# Altium PCB FOC_Mode_V1.PcbDoc
Units mm, origin at the board's own origin, x right, y up, seen from the top; angles counter-clockwise.
Board outline 28 x 45 mm, 6 copper layers (Top Layer, GND, Sig1, Sig2, Power, Bottom Layer), stack 1.878 mm thick; 102 components, 74 nets, 288 pads, 337 vias.
Unrouted connection lines stored in the file: 67.
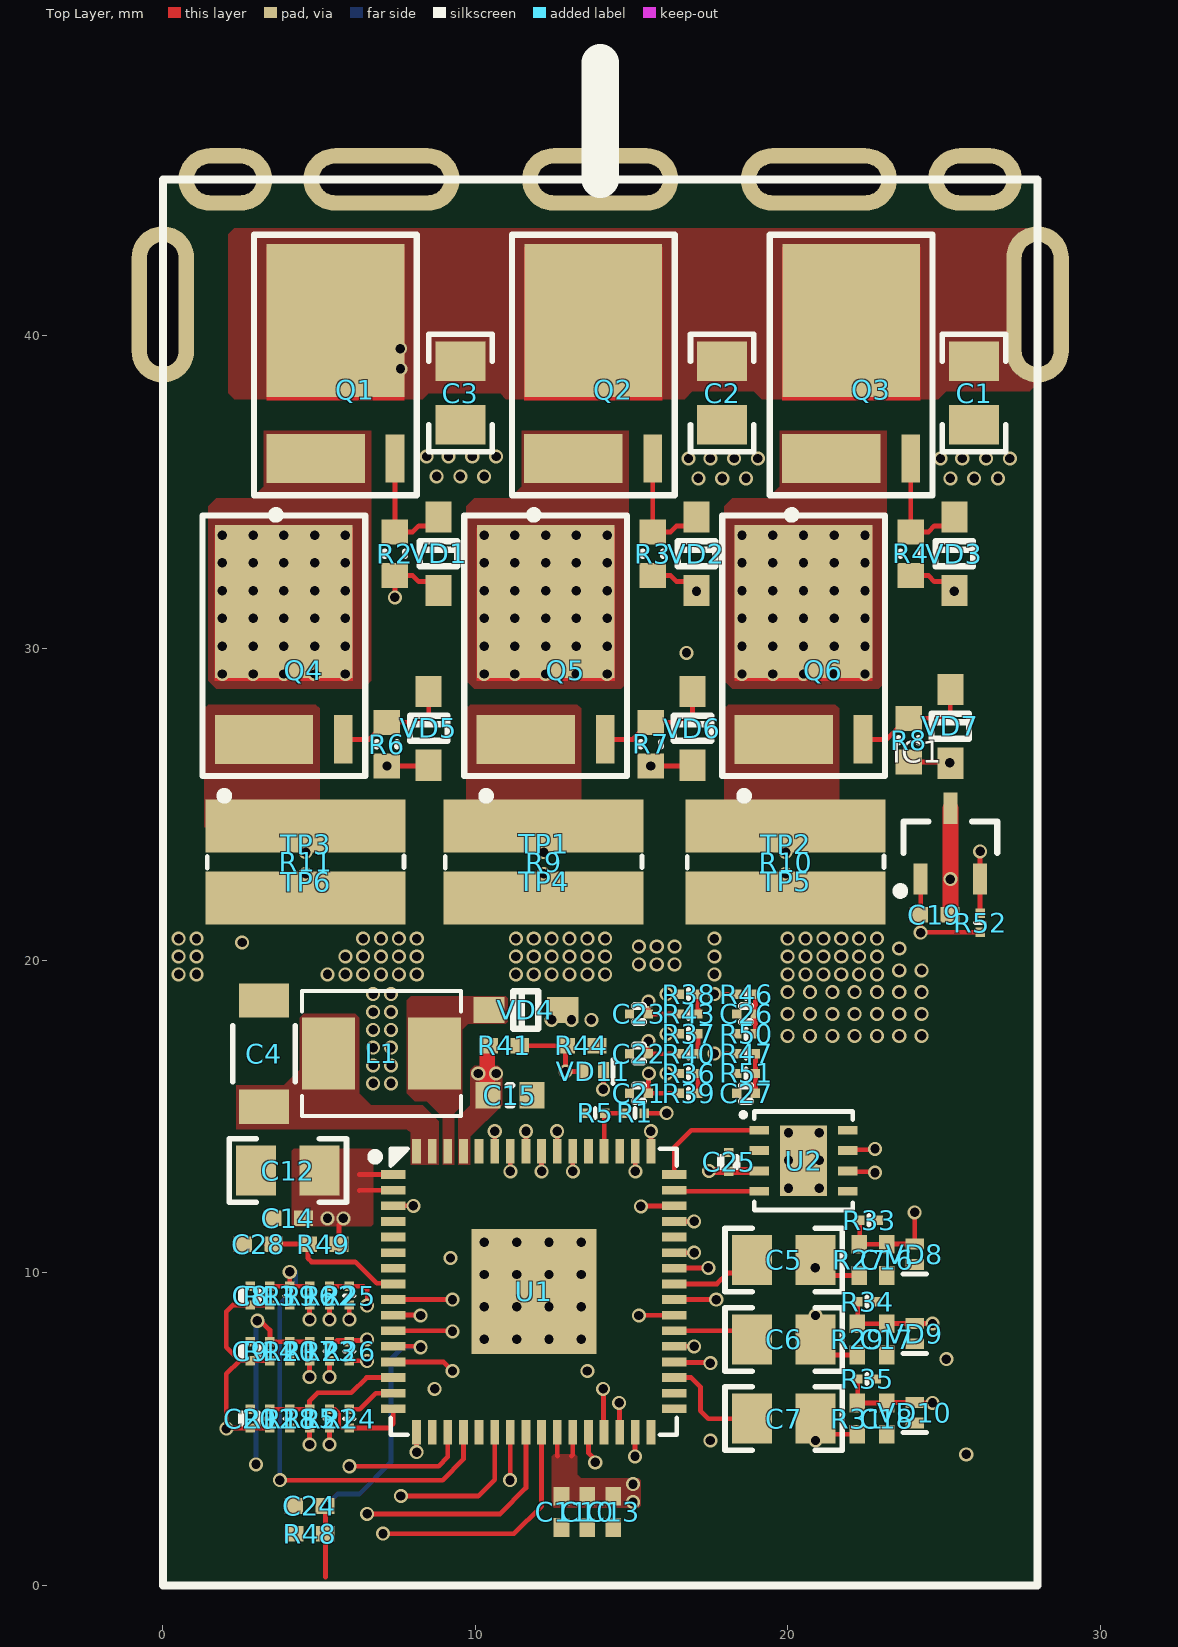
[diagram p0: Top Layer view]
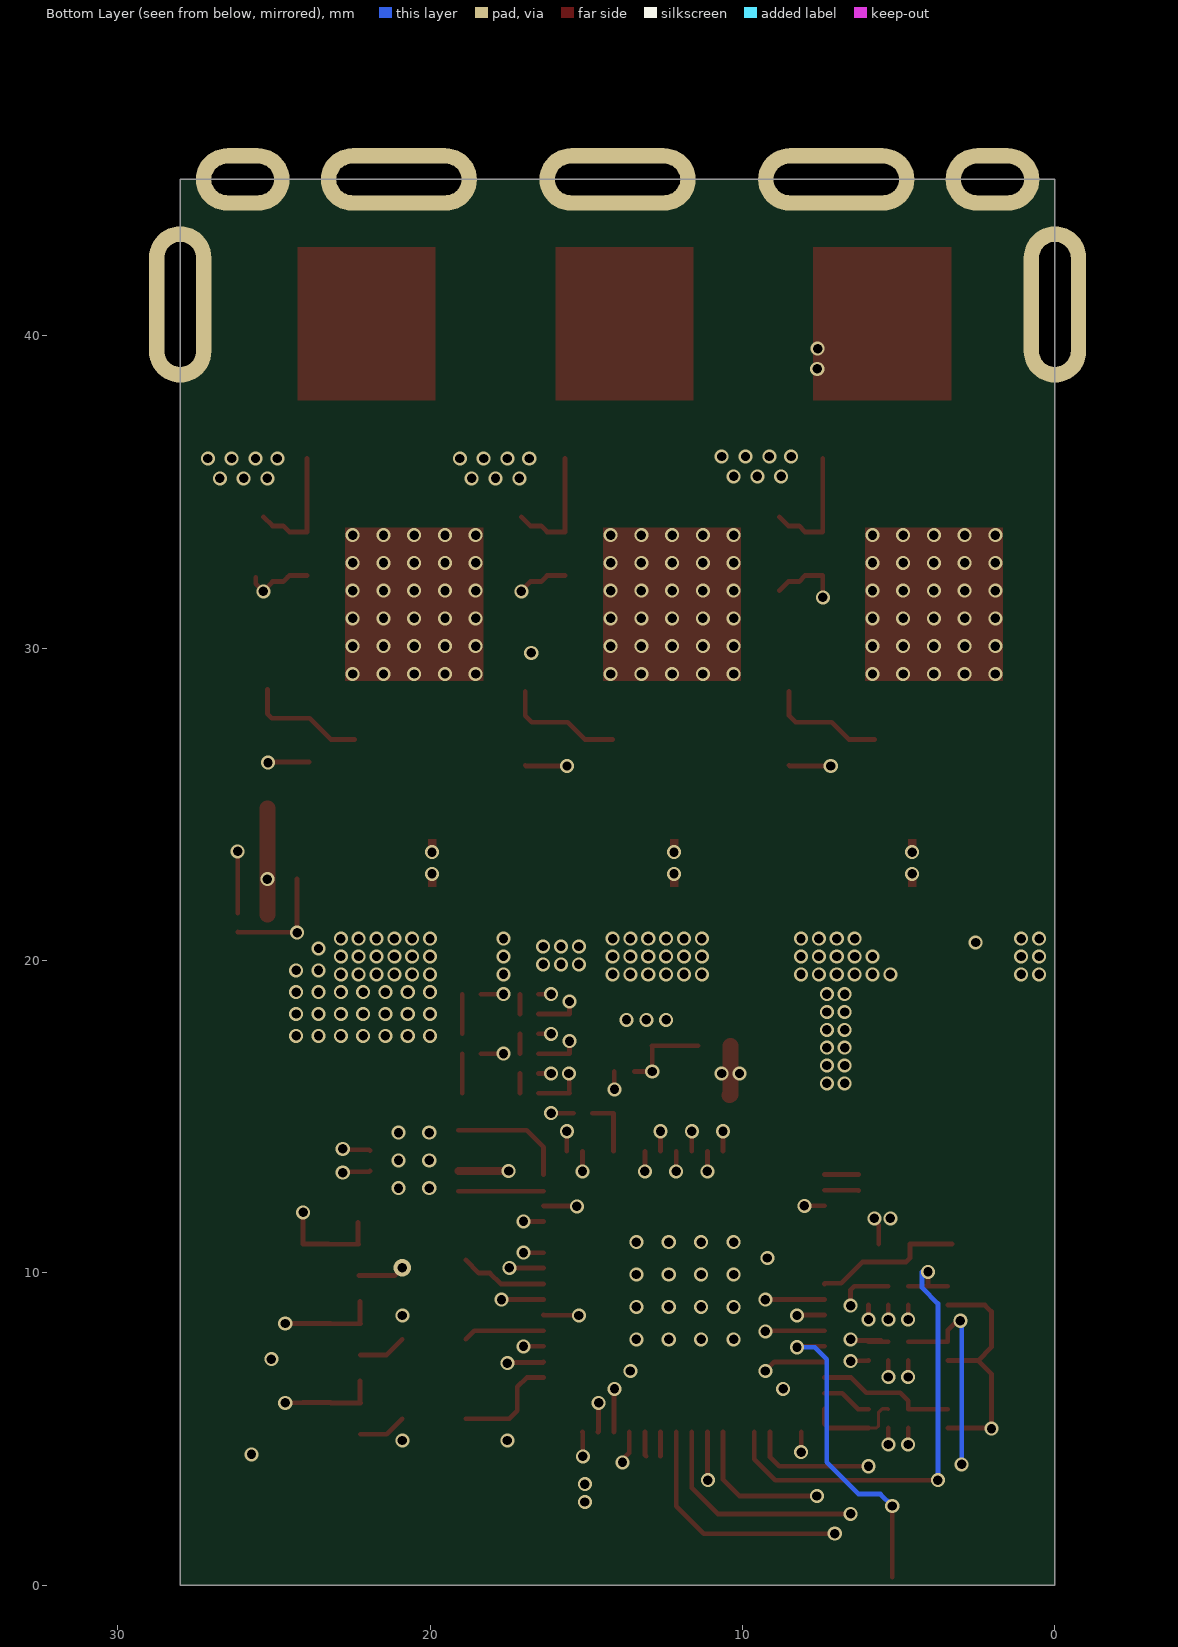
[diagram p1: Bottom Layer view, seen from below]
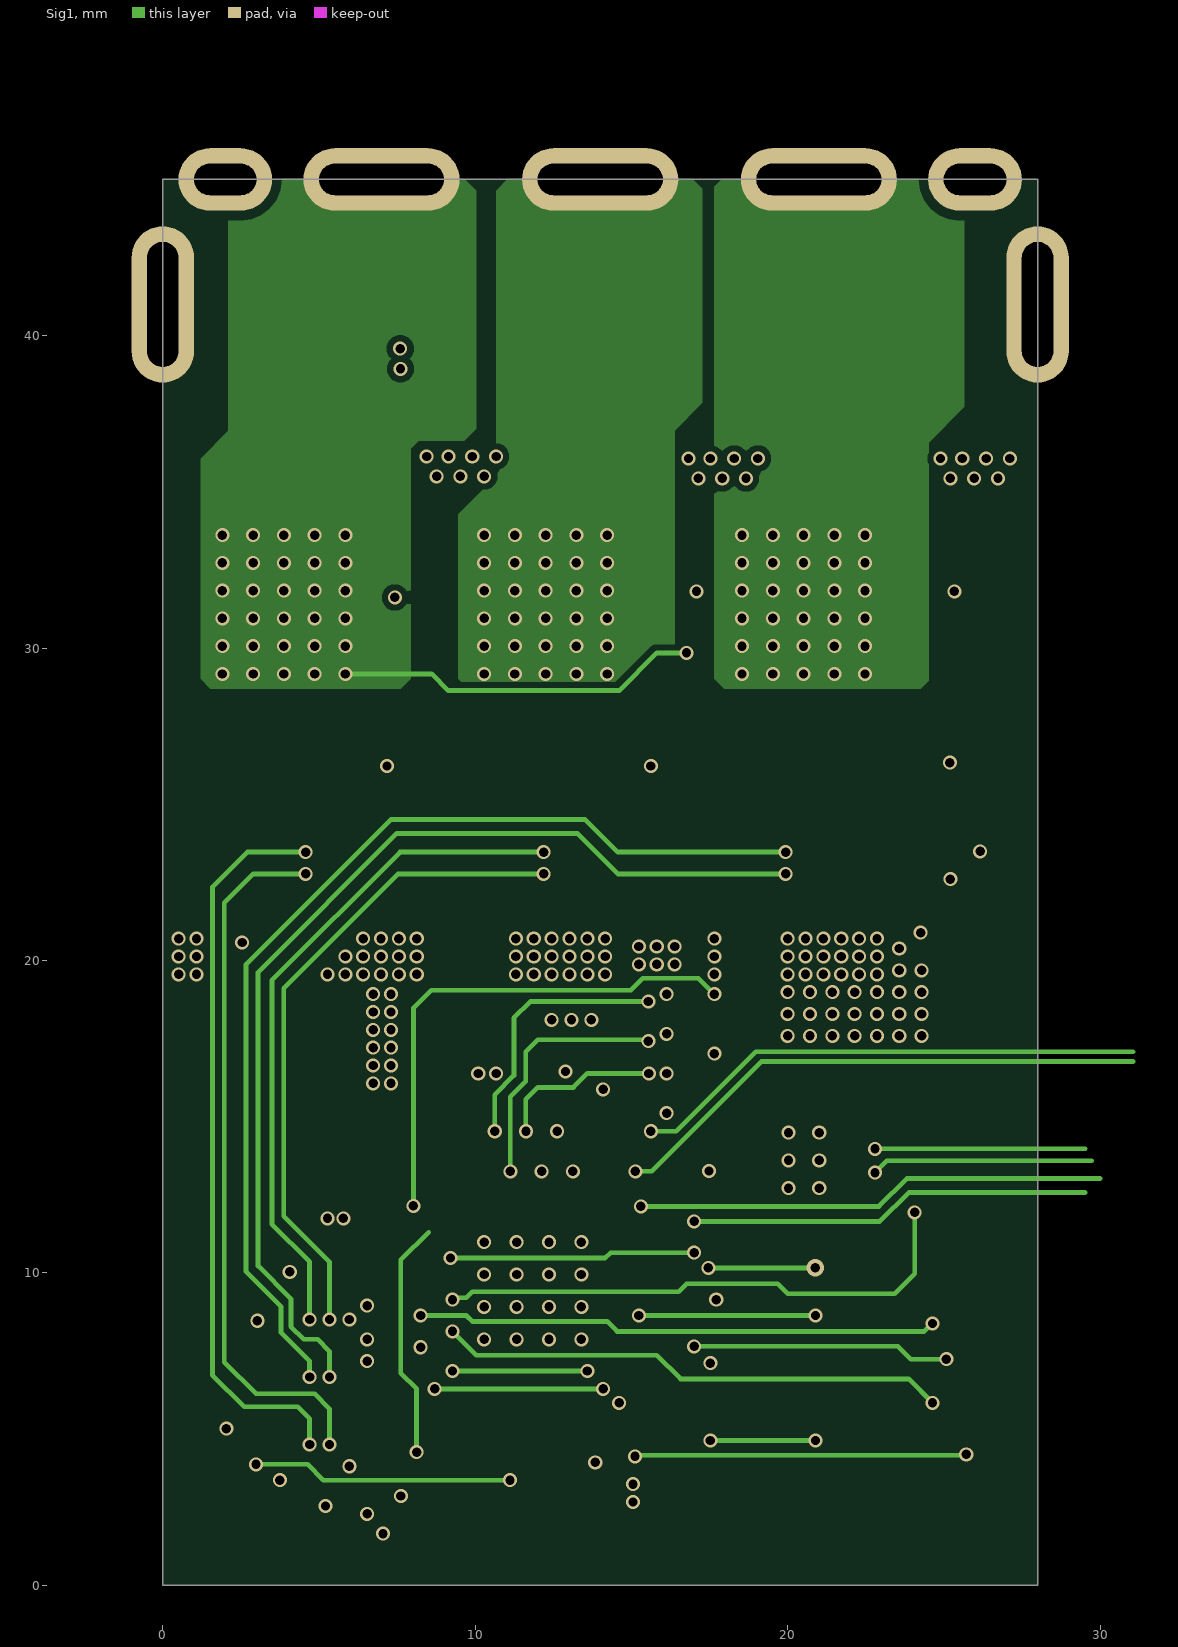
[diagram p2: Sig1]
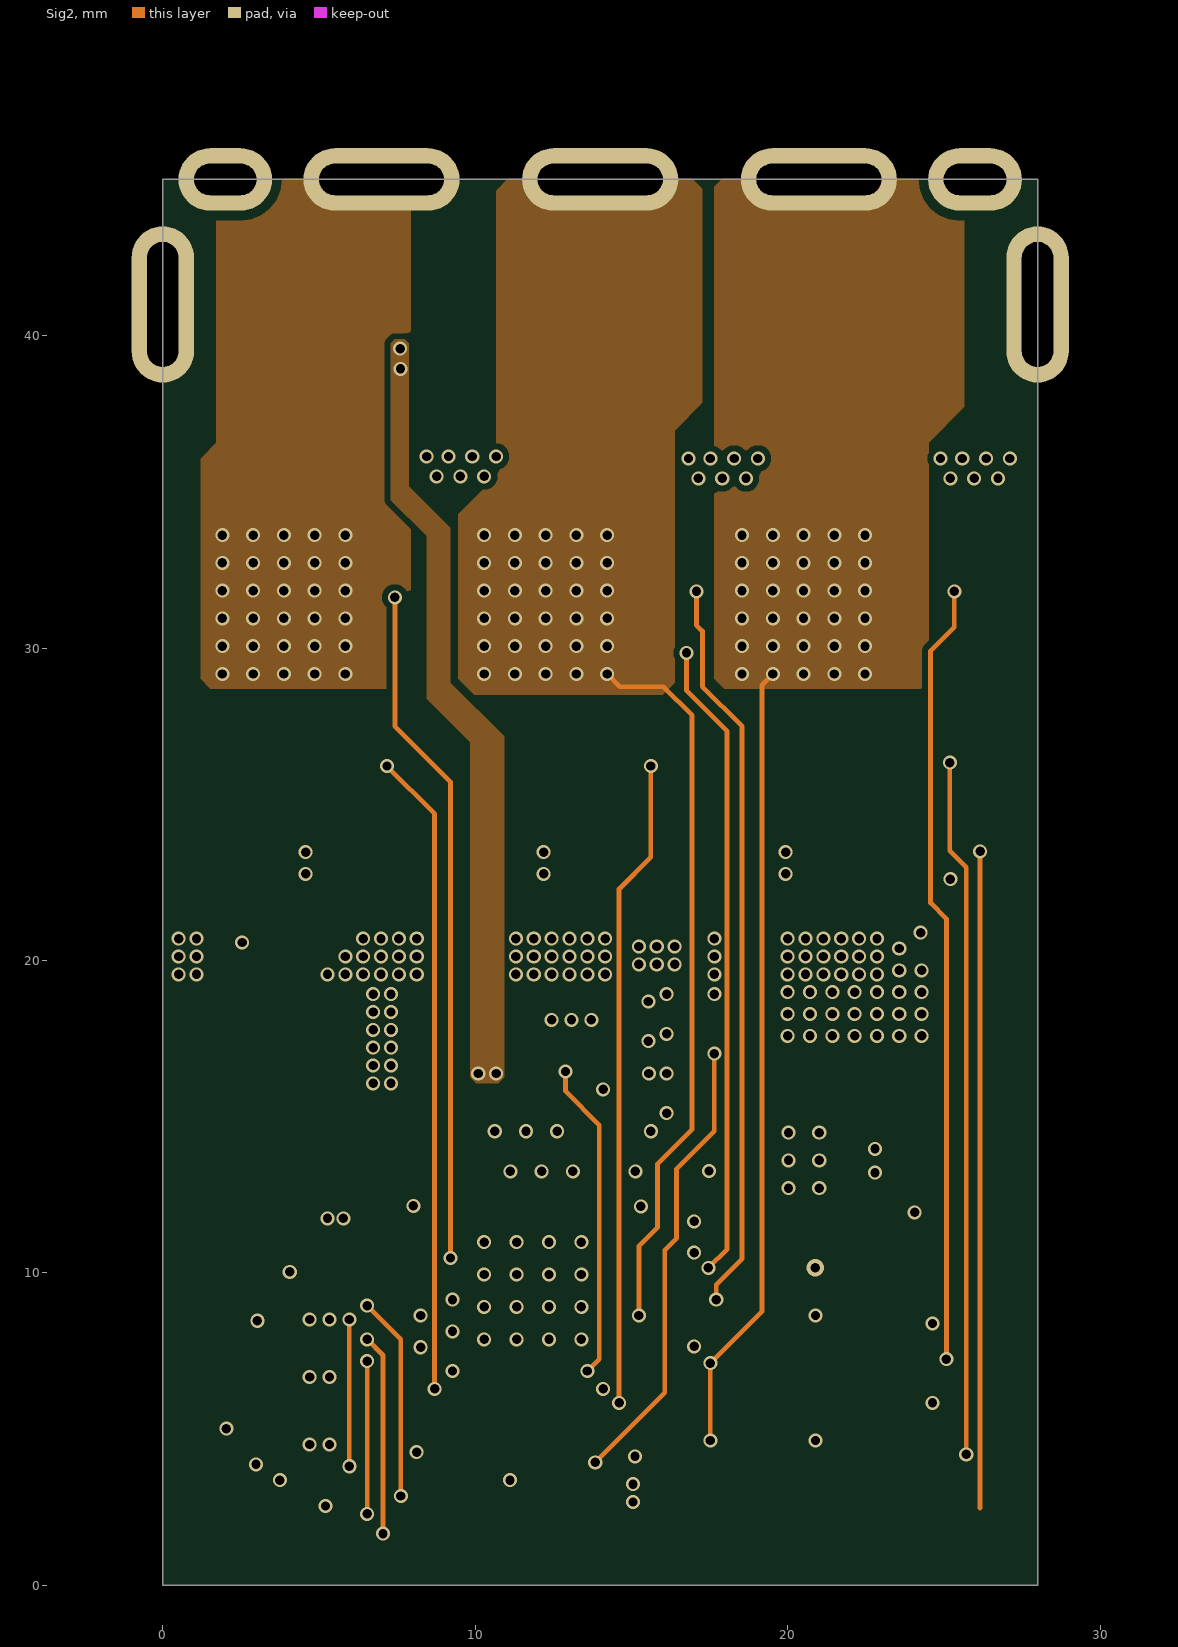
[diagram p3: Sig2]
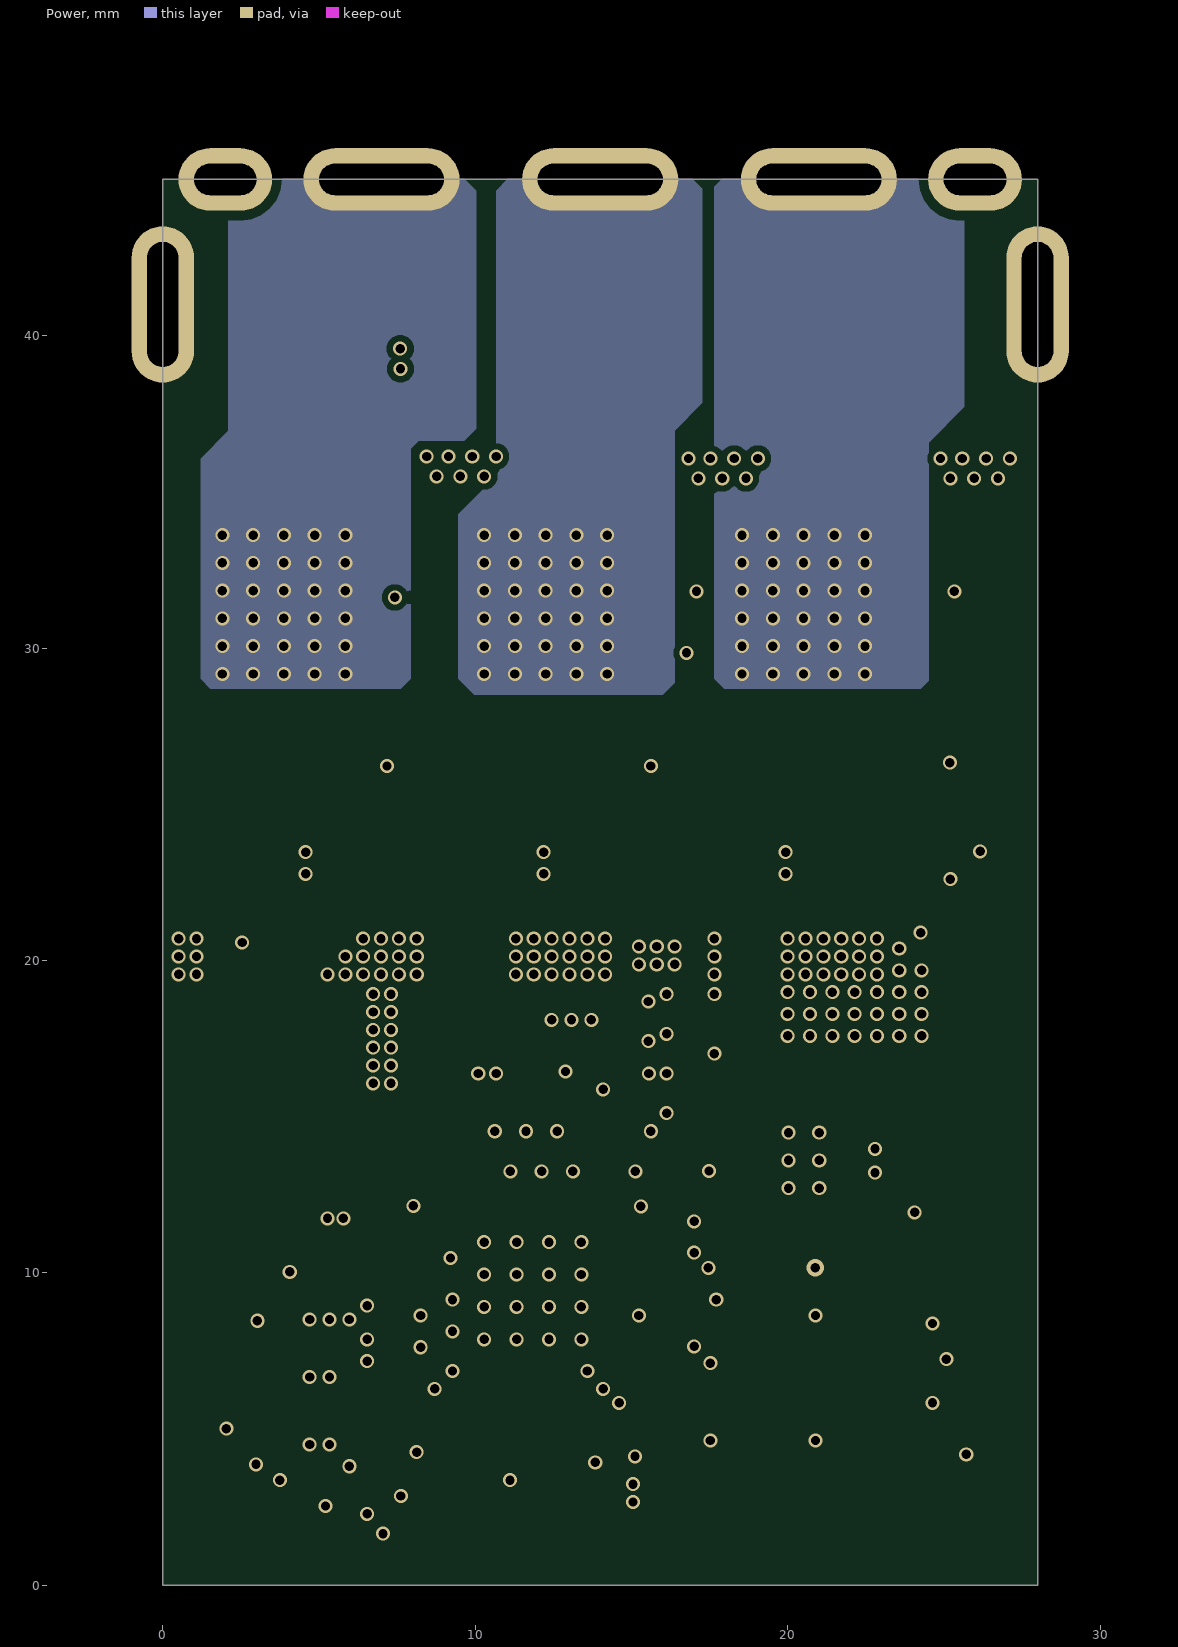
[diagram p4: Power]
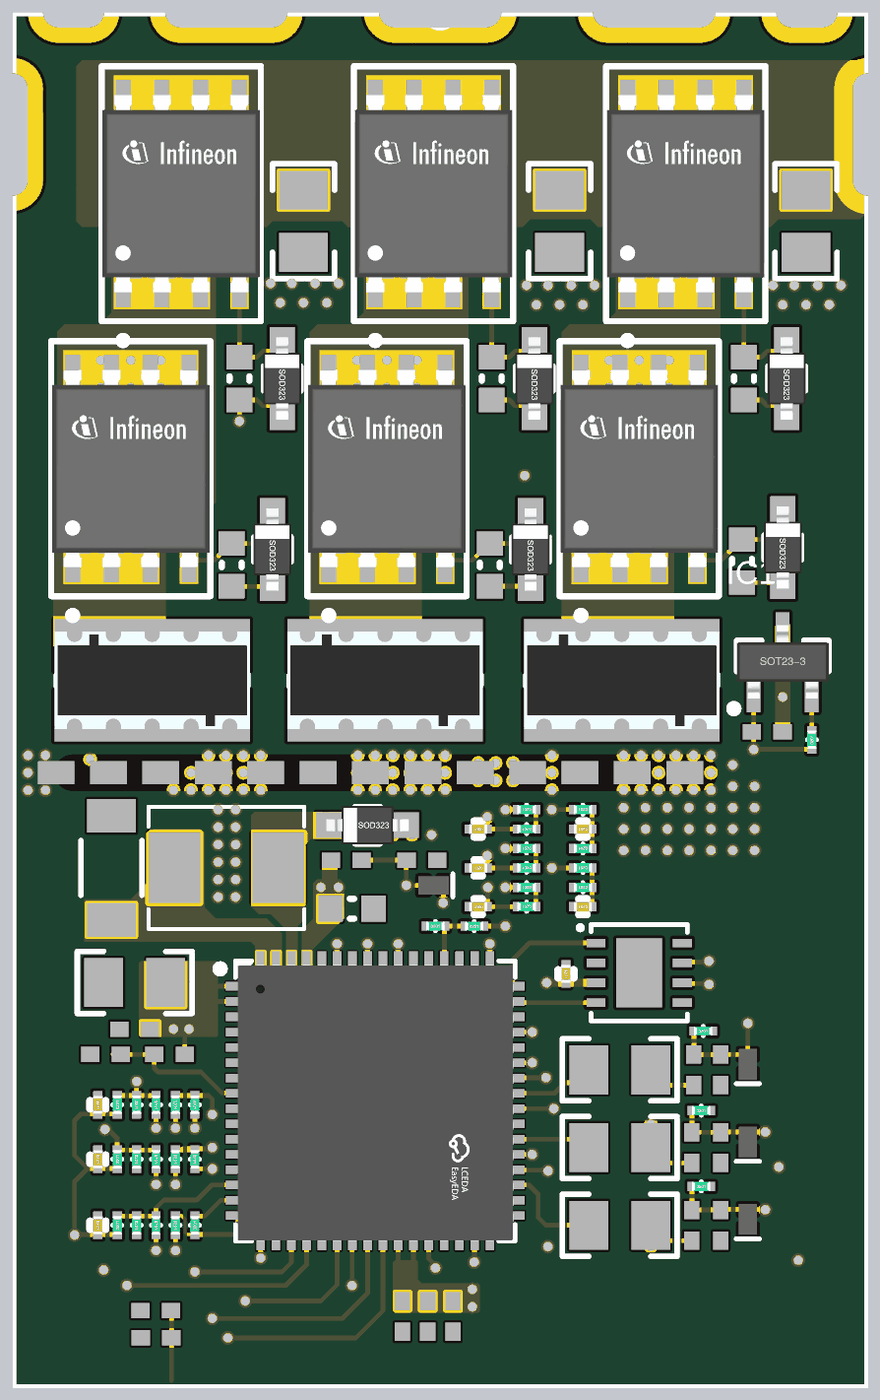
[diagram p5: 3D render of the assembled board from above, using the file's embedded part models]

## Layer stack, top to bottom
Top Solder: solder mask 0.0102, Solder Resist, Dk 3.5
Top Layer: signal copper 0.035
Dielectric 2: prepreg 0.11, PP-006, Dk 4.1
GND: signal copper 0.017
Dielectric 4: prepreg 0.6, PP-006, Dk 4.1
Sig1: signal copper 0.017
Dielectric 1: dielectric 0.32, FR-4, Dk 4.8
Sig2: signal copper 0.017
Dielectric 5: prepreg 0.6, PP-006, Dk 4.1
Power: signal copper 0.017
Dielectric 3: prepreg 0.11, PP-006, Dk 4.1
Bottom Layer: signal copper 0.035
Bottom Solder: solder mask 0.0102, Solder Resist, Dk 3.5

## Board outline
0,0 0,45 28,45 28,0

## Design rules (kind name [scope] priority, off if disabled: settings)
Clearance Clearance_1 [InNamedPolygon('OUTPUT_U') OR InNamedPolygon('OUTPUT_V')  OR InNamedPolygon('OUTPUT_w')] p1: gap=0.102 ignorepadtopadclearanceinfootprint=TRUE except(0.203: Arc-Poly Track-Poly SMDPad-Poly Via-Poly Fill-Poly Poly-Poly; 0.305: THPad-Poly)
Clearance [All] p2: gap=0.102 ignorepadtopadclearanceinfootprint=TRUE
ComponentClearance [All] p1: gap=0 collisioncheckmode=3 verticalgap=0 showdistances=FALSE
DiffPairsRouting [All] p1: maxlimit=9 minlimit=0.127 mostfreqgap=0.152 toplayer_minwidth=0.102 toplayer_maxwidth=9 toplayer_prefwidth=0.152 midlayer1_minwidth=0.102 midlayer1_maxwidth=9 midlayer1_prefwidth=0.152 midlayer2_minwidth=0.102 midlayer2_maxwidth=9 midlayer2_prefwidth=0.152 midlayer3_minwidth=0.102 midlayer3_maxwidth=9 midlayer3_prefwidth=0.152 midlayer4_minwidth=0.102 midlayer4_maxwidth=9 midlayer4_prefwidth=0.152 bottomlayer_minwidth=0.102 bottomlayer_maxwidth=9 bottomlayer_prefwidth=0.152 maxuncoupledlength=12.7
Height [All] p1: minheight=0 maxheight=4 prefheight=3
HoleSize [All] p1: absolutevalues=TRUE maxlimit=999 minlimit=0.3 maxpercent=80.000 minpercent=20.000
MinimumSolderMaskSliver [All] p1: minsoldermaskwidth=0
PlaneConnect [All] p1: planeconnectstyle=Direct reliefexpansion=0.508 reliefentries=4 reliefconductorwidth=0.254 reliefairgap=0.254
PolygonConnect [All] p1: connectstyle=Direct reliefconductorwidth=0.254 reliefentries=4 polygonreliefangle="90 Angle" airgapwidth=0.254
RoutingVias [All] p1: holewidth=0.3 width=0.45 viastyle="Through Hole" minholewidth=0.3 minwidth=0.4 maxholewidth=9 maxwidth=10
SilkToSilkClearance [All] p1: silktosilkclearance=0
SilkToSolderMaskClearance [IsPad] p1: minsilkscreentomaskgap=0 clearancetoexposedcopper=TRUE
SolderMaskExpansion [All] p1: expansion=0.102 istentingtop=FALSE
Width [All] p1: maxlimit=99 minlimit=0.102 preferedwidth=0.152
22 further rules are at their usual default settings.

## Components (designator, comment, footprint, x,y, rotation, side; value= is the part's Value field where it differs from the comment)
C1 "220nF 100V" "C 0805" 25.971,38.163 r90 top
C2 "220nF 100V" "C 0805" 17.907,38.163 r90 top
C3 "220nF 100V" "C 0805" 9.525,38.163 r90 top
C4 "10uF 25V" "C 1206" 3.238,17.018 r270 top
C5 "1uF" "C 0805" 19.875,10.414 r0 top
C6 "1uF" "C 0805" 19.875,7.874 r0 top
C7 "1uF" "C 0805" 19.875,5.334 r0 top
C8 "100nF 16V X7R" "C 0201" 2.794,9.271 r270 top
C9 "100nF 16V X7R" "C 0201" 2.794,7.493 r270 top
C10 "100nF 50V" "C 0402" 13.589,2.349 r90 top
C11 "100nF 50V" "C 0402" 12.763,2.349 r90 top
C12 "10uF 25V" "C 0805" 4,13.271 r0 top
C13 "1uF 25V" "C 0402" 14.414,2.349 r90 top
C14 "1uF 25V" "C 0402" 4,11.747 r0 top
C15 "220nF 50V" "C 0603" 11.112,15.684 r180 top
C16 "82nF" "C 0402" 23.177,10.414 r270 top
C17 "82nF" "C 0402" 23.177,7.874 r270 top
C18 "82nF" "C 0402" 23.177,5.334 r270 top
C19 "1uF" "C 0402" 24.701,21.463 r0 top
C20 "100nF 16V X7R" "C 0201" 2.794,5.334 r270 top
C21 "1nF 50V X7R" "C 0201" 15.24,15.748 r180 top
C22 "1nF 50V X7R" "C 0201" 15.24,17.018 r180 top
C23 "1nF 50V X7R" "C 0201" 15.24,18.288 r180 top
C24 "100nF" "C 0402" 4.691,2.54 r180 top
C25 "100nf" "C 0201" 18.114,13.553 r270 top
C26 "1nF 50V X7R" "C 0201" 18.669,18.288 r180 top
C27 "1nF 50V X7R" "C 0201" 18.669,15.748 r180 top
C28 "1uF" "C 0402" 3.048,10.922 r180 top
IC1 "M1601" SOT23-3L 25.209,23.749 r0 top
L1 "15uH" WHC0420(4x4x2) 5.199,17.218 r270 top
Q1 "BSC070N10NS5" INF-PG-TDSON-8-33-V 5.525,39.115 r90 top
Q2 "BSC070N10NS5" INF-PG-TDSON-8-33-V 13.78,39.115 r90 top
Q3 "BSC070N10NS5" INF-PG-TDSON-8-33-V 22.035,39.115 r90 top
Q4 "BSC070N10NS5" INF-PG-TDSON-8-33-V 3.873,30.124 r90 top
Q5 "BSC070N10NS5" INF-PG-TDSON-8-33-V 12.255,30.124 r90 top
Q6 "BSC070N10NS5" INF-PG-TDSON-8-33-V 20.511,30.124 r90 top
R1 "22K 1%" "R 0201" 15.113,15.113 r0 top
R2 "33R" "R 0603" 7.429,33.02 r270 top
R3 "33R" "R 0603" 15.684,33.02 r270 top
R4 "33R" "R 0603" 23.939,33.02 r270 top
R5 "10K 1%" "R 0201" 13.843,15.113 r0 top
R6 "33R" "R 0603" 7.175,26.924 r270 top
R7 "33R" "R 0603" 15.621,26.924 r270 top
R8 "33R" "R 0603" 23.876,27.051 r270 top
R9 "5mR" 1225 12.192,23.152 r90 top
R10 "5mR" 1225 19.939,23.152 r90 top
R11 "5mR" 1225 4.572,23.152 r90 top
R12 "22K" "R 0201" 3.429,5.334 r90 top
R13 "22K" "R 0201" 3.429,9.271 r90 top
R14 "22K" "R 0201" 3.429,7.493 r90 top
R15 "1.5K" "R 0201" 4.699,5.334 r270 top
R16 "1.5K" "R 0201" 4.699,9.271 r270 top
R17 "1.5K" "R 0201" 4.699,7.493 r270 top
R18 "22K" "R 0201" 4.064,5.334 r270 top
R19 "22K" "R 0201" 4.064,9.271 r270 top
R20 "22K" "R 0201" 4.064,7.493 r270 top
R21 "1.5K" "R 0201" 5.334,5.334 r270 top
R22 "1.5K" "R 0201" 5.334,9.271 r270 top
R23 "1.5K" "R 0201" 5.334,7.493 r270 top
R24 "11K" "R 0201" 5.969,5.334 r90 top
R25 "11K" "R 0201" 5.969,9.271 r270 top
R26 "11K" "R 0201" 5.969,7.493 r270 top
R27 "95K" "R 0402" 22.288,10.414 r270 top
R29 "95K" "R 0402" 22.225,7.874 r270 top
R31 "95K" "R 0402" 22.225,5.334 r270 top
R33 "3.9K" "R 0201" 22.606,11.684 r0 top
R34 "3.9K" "R 0201" 22.543,9.08 r0 top
R35 "3.9K" "R 0201" 22.543,6.604 r0 top
R36 "10K" "R 0201" 16.828,16.383 r180 top
R37 "10K" "R 0201" 16.828,17.653 r180 top
R38 "10K" "R 0201" 16.828,18.923 r180 top
R39 "10K" "R 0201" 16.828,15.748 r180 top
R40 "10K" "R 0201" 16.828,17.018 r180 top
R41 "72.3K" "R 0402" 10.922,17.272 r180 top
R43 "10K" "R 0201" 16.828,18.288 r180 top
R44 "3.01K" "R 0402" 13.399,17.272 r180 top
R46 "200R" "R 0201" 18.669,18.923 r180 top
R47 "200R" "R 0201" 18.669,17.018 r180 top
R48 "100K" "R 0402" 4.699,1.651 r180 top
R49 "10K" "R 0402" 5.143,10.922 r180 top
R50 "100K" "R 0201" 18.669,17.653 r180 top
R51 "100K" "R 0201" 18.669,16.383 r180 top
R52 "4.7K" "R 0201" 26.162,21.209 r90 top
TP1 "NetTie" Net-Tie_10mil 12.192,23.724 r270 top net-tie
TP2 "NetTie" Net-Tie_10mil 19.939,23.724 r270 top net-tie
TP3 "NetTie" Net-Tie_10mil 4.572,23.724 r270 top net-tie
TP4 "NetTie" Net-Tie_10mil 12.192,22.517 r90 top net-tie
TP5 "NetTie" Net-Tie_10mil 19.939,22.517 r90 top net-tie
TP6 "NetTie" Net-Tie_10mil 4.572,22.517 r90 top net-tie
U1 "STSPIN32G4" VFQFPN-64_L9.0-W9.0-P0.50-TL-EP4.0 11.874,9.398 r0 top
U2 "SIT1057QTK/3" DFN-8_L3.0-W3.0-P0.65-BL-EP 20.511,13.589 r270 top
VD1 "BAT48" SOD-323 8.826,33.02 r270 top
VD2 "BAT48" SOD-323 17.081,33.02 r270 top
VD3 "BAT48" SOD-323 25.336,33.02 r270 top
VD4 "DSK110" SOD-323 11.62,18.415 r0 top
VD5 "BAT48" SOD-323 8.509,27.432 r270 top
VD6 "BAT48" SOD-323 16.954,27.432 r270 top
VD7 "BAT48" SOD-323 25.209,27.495 r270 top
VD8 "RB161QS-40" RB161QS40T18R 24.066,10.597 r180 top
VD9 "RB161QS-40" RB161QS40T18R 24.066,8.057 r180 top
VD10 "RB161QS-40" RB161QS40T18R 24.066,5.524 r180 top
VD11 "RB161QS-40" RB161QS40T18R 13.779,16.447 r270 top

## Footprints (in the part's own frame and the unit in brackets; to place one, negate y for a bottom-side part, rotate by r counter-clockwise, add the part's x,y. Pads: shape width x height; smd on the part's side, far side on the other; paste and mask are expansions set on the pad)
1225 [mm]
  rect 1.7x6.4 smd: 1(-1.15,0) 2(1.15,0)
  silkscreen extent -0.2,-3.15 0.2,3.15, body extent -1.6,-3.2 1.6,3.2, height 0.55
"C 0201" [mm] "无极性贴片电容"
  rect 0.3x0.3 smd: 1(-0.3,0) 2(0.3,0)
  silkscreen extent -0.13,-0.25 0.13,0.25, body extent -0.3,-0.16 0.3,0.16, height 0.31
"C 0402" [mm] "无极性贴片电容"
  rect 0.6x0.5 smd mask+0.076: 1(-0.5,0) 2(0.5,0)
  body extent -0.55,-0.3 0.55,0.3, height 0.6
"C 0603" [mm] "无极性贴片电容"
  rect 0.8x0.85 smd mask+0.076: 1(-0.7,0) 2(0.7,0)
  silkscreen extent -0.07,-0.32 0.07,0.32, body extent -0.87,-0.47 0.87,0.47, height 1
"C 0805" [mil] "无极性贴片电容"
  rect 50x63 smd mask+3: 1(-40,0) 2(40,0)
  silkscreen extent -74,-40 74,40, body extent -43,-29 43,29, height 57
"C 1206" [mm] "无极性贴片电容"
  rect 1.1x1.6 smd mask+0.076: 1(-1.7,0) 2(1.7,0)
  silkscreen extent -0.9,-1 0.9,1, body extent -1.75,-0.95 1.75,0.95, height 1.8
DFN-8_L3.0-W3.0-P0.65-BL-EP [mm]
  rect 0.28x0.625 smd: 1(-0.975,-1.412) 2(-0.325,-1.412) 3(0.325,-1.412) 4(0.975,-1.412) 5(0.975,1.412) 6(0.325,1.412) 7(-0.325,1.412) 8(-0.975,1.412)
  rect 2.25x1.5 smd: 9(0,0)
  silkscreen extent -1.58,-2.01 1.58,1.58, body extent -1.52,-1.52 1.52,1.52, height 0.9
INF-PG-TDSON-8-33-V [mm] "TDSON 8, 1.27mm pitch; 8 pin,5.15mm W X 5.48mm L X 1.10mm H body"
  rect 1.55x0.6 smd paste-1.55 mask+0: 1(-3.047,-1.905)
  rect 1.57x3.15 smd paste-1.55 mask+0: 2(-3.048,0.635)
  rect 4.9x4.41 smd paste-1.35 mask+0: 3(1.372,0)
  Top Layer region: 3.722,2.205 3.722,-2.205 -1.177,-2.205 -1.177,2.205
  silkscreen extent -4.98,-2.6 4.12,2.61, body extent -3.27,-2.71 3.17,2.7, height 1.01
Net-Tie_10mil [mil] "10mil net tie, no solder mask opening, no solder paste"
  rect 10x10 smd paste-5 mask-5: 1(-10,0) 2(10,0)
  Top Layer region: -6,5 6,5 6,-5 -6,-5
"R 0201" [mm] "1/20W贴片电阻"
  rect 0.3x0.3 smd: 1(-0.3,0) 2(0.3,0)
  silkscreen extent 0,-0.15 0,0.15, body extent -0.3,-0.15 0.3,0.15, height 0.23
"R 0402" [mm] "1/16W贴片电阻"
  rect 0.6x0.5 smd mask+0.076: 1(-0.5,0) 2(0.5,0)
  body extent -0.55,-0.3 0.55,0.3, height 0.6
"R 0603" [mm] "1/10W贴片电阻"
  rect 0.8x0.85 smd mask+0.076: 1(-0.7,0) 2(0.7,0)
  silkscreen extent -0.07,-0.32 0.07,0.32, body extent -0.87,-0.47 0.87,0.47, height 1
RB161QS40T18R [mm]
  rect 0.6x0.35 smd: 1(0,-0.325) 2(0,0.325)
  silkscreen extent -0.38,0.63 0.38,0.64, body extent -0.3,-0.5 0.3,0.5, height 0.34
SOD-323 [mm]
  rect 1x0.83 smd: 1(1.18,0) 2(-1.18,0)
  silkscreen extent -0.4,-0.6 0.4,0.6, body extent -1.35,-0.62 1.35,0.63, height 1.1
SOT23-3L [mm] "3x1.3x1mm(长宽高)"
  rect 0.45x1 smd: 1(-0.95,-1.143) 2(0.95,-1.143) 3(0,1.125)
  silkscreen extent -1.72,-1.65 1.5,0.7, body extent -1.5,-1.2 1.5,1.2, height 1.05
VFQFPN-64_L9.0-W9.0-P0.50-TL-EP4.0 [mm]
  rect 0.79x0.28 smd paste-100 mask+0.05: 1(-4.495,3.75) 2(-4.495,3.25) 3(-4.495,2.75) 4(-4.495,2.25) 5(-4.495,1.75) 6(-4.495,1.25) 7(-4.495,0.75) 8(-4.495,0.25) 9(-4.495,-0.25) 10(-4.495,-0.75) 11(-4.495,-1.25) 12(-4.495,-1.75) 13(-4.495,-2.25) 14(-4.495,-2.75) 15(-4.495,-3.25) 16(-4.495,-3.75) 33(4.495,-3.75) 34(4.495,-3.25) 35(4.495,-2.75) 36(4.495,-2.25) 37(4.495,-1.75) 38(4.495,-1.25) 39(4.495,-0.75) 40(4.495,-0.25) 41(4.495,0.25) 42(4.495,0.75) 43(4.495,1.25) 44(4.495,1.75) 45(4.495,2.25) 46(4.495,2.75) 47(4.495,3.25) 48(4.495,3.75)
  rect 0.28x0.79 smd paste-100 mask+0.05: 17(-3.75,-4.495) 18(-3.25,-4.495) 19(-2.75,-4.495) 20(-2.25,-4.495) 21(-1.75,-4.495) 22(-1.25,-4.495) 23(-0.75,-4.495) 24(-0.25,-4.495) 25(0.25,-4.495) 26(0.75,-4.495) 27(1.25,-4.495) 28(1.75,-4.495) 29(2.25,-4.495) 30(2.75,-4.495) 31(3.25,-4.495) 32(3.75,-4.495) 49(3.75,4.495) 50(3.25,4.495) 51(2.75,4.495) 52(2.25,4.495) 53(1.75,4.495) 54(1.25,4.495) 55(0.75,4.495) 56(0.25,4.495) 57(-0.25,4.495) 58(-0.75,4.495) 59(-1.25,4.495) 60(-1.75,4.495) 61(-2.25,4.495) 62(-2.75,4.495) 63(-3.25,4.495) 64(-3.75,4.495)
  rect 4x4 smd paste-100 mask+0.05: 65(0,0)
  silkscreen extent -5.2,-4.58 4.58,4.58, body extent -4.51,-4.58 4.51,4.45, height 0.92
WHC0420(4x4x2) [mm]
  rect 2.3x1.7 smd: 1(0.2,3.5) 2(0.2,0.1)
  silkscreen extent -1.8,-0.75 2.2,4.35, body extent -1.8,-0.44 2.2,4.04, height 2

## Part data
C1 C2 C3 C4 C5 C6 C7 C8 C9 C10 C11 C12 C13 C14 C15 C16 C17 C18 C19 C20 C21 C22 C23 C24 C25 C26 C27 C28: library part C, "无极性贴片电容", BOM名称=无极性贴片电容, 学习资源=www.ooocke.com, 版权归属=源创客
IC1: "高精度数字模拟混合信号温度传感芯片"
L1: library part L-CDRH, "功率屏蔽电感", BOM名称=功率屏蔽电感, 学习资源=www.ooocke.com, 版权归属=源创客
Q1 Q2 Q3 Q4 Q5 Q6: library part 5*6NMOS, "100V 80A N沟道", Continuous Drain Current (Id)=80A, Drain Source On Resistance (RDS(on)@Vgs,Id)=7mΩ@10V,40A, Drain Source Voltage (Vdss)=100V, Gate Threshold Voltage (Vgs(th)@Id)=3.8V@50uA, JLCPCB Part Class="Extended Part", LCSC Part Name="N沟道 100V 80A", Manufacturer=Infineon(英飞凌), Power Dissipation (Pd)=2.5W, Add into BOM=yes, Convert to PCB=yes, Datasheet=https://atta.szlcsc.com/upload/public/pdf/source/20200515/C534364_BA39A7B9D829D572459A8BCBA64659C5.pdf, Device=BSC070N10NS5, Manufacturer Part=BSC070N10NS5, Name=BSC070N10NS5, Supplier=LCSC, Supplier Footprint=TDSON-8(6x5), Supplier Part=C534364, Symbol=BSC070N10NS5, Type=N沟道
R1 R2 R3 R4 R5 R6 R7 R8 R9 R10 R11 R12 R13 R14 R15 R16 R17 R18 R19 R20 R21 R22 R23 R24 R25 R26 R27 R29 R31 R33 R34 R35 R36 R37 R38 R39 R40 R41 R43 R44 R46 R47 R48 R49 R50 R51 R52: library part R, "贴片电阻", BOM名称=贴片电阻, 学习资源=www.ooocke.com, 版权归属=源创客
TP1 TP2 TP3 TP4 TP5 TP6: "网络连接", BOM名称=调试断点焊盘, 学习资源=www.ooocke.com, 版权归属=源创客
U1: "高性能三相电机控制器，内置STM32G4单片机", JLCPCB Part Class="Extended Part", Manufacturer=ST(意法半导体), Add into BOM=yes, Convert to PCB=yes, Datasheet=https://atta.szlcsc.com/upload/public/pdf/source/20221107/7278755029A6D1BE96BC9542C7938EA4.pdf, Device=STSPIN32G4, LCSC Part Name=STSPIN32G4, Manufacturer Part=STSPIN32G4, Name=STSPIN32G4, Supplier=LCSC, Supplier Footprint=VFQFPN-64(9x9), Supplier Part=C2858620, Symbol=STSPIN32G4
U2: library part SIT3051TK, "C7433967", JLCPCB Part Class="Extended Part", LCSC Part Name=CAN收发器芯片, Manufacturer=SIT(芯力特), Add into BOM=yes, Convert to PCB=yes, Datasheet=https://atta.szlcsc.com/upload/public/pdf/source/20200610/C601078_B1F4AB5D187DBA98E917965AB02FEC6C.pdf, Device=SIT3051TK, Manufacturer Part=SIT3051TK, Name=SIT3051TK, Supplier=LCSC, Supplier Footprint=DFN-8(3x3), Supplier Part=C601078, Symbol=SIT3051TK, Type=-
VD1 VD2 VD3 VD4 VD5 VD6 VD7: library part 1N4148, "肖特基二极管", BOM名称=高速开关二极管, 学习资源=www.ooocke.com, 版权归属=源创客
VD8 VD9 VD10 VD11: library part Schottky, "肖特基二极管", BOM名称=肖特基二极管, 学习资源=www.ooocke.com, 属性=40V/1A, 版权归属=源创客

## Free pads (board coordinates)
  oval 3x2 hole 1 slot 2 at 0 deg: CNT(2,45) CNT(26,45)
  oval 2x5 hole 1 slot 4 at 90 deg: PW_GND(0,41) PW_IN(28,41)
  oval 5x2 hole 1 slot 4 at 0 deg: U(7,45) V(14,45) W(21,45)

## Via types
v1: diameter 0.45, hole 0.3, Top Layer to Bottom Layer, tented both sides, 336 vias
v2: diameter 0.559, hole 0.305, Top Layer to Bottom Layer, tented both sides, 1 vias

## Nets (pads, with @x,y where several pads share a name; then routed paths per layer and width w, separated by ;. In a path a pad name is that pad's centre, name@x,y a point inside that pad or via, vN(x,y) a via of type N, cw(c..) or ccw(c..) an arc to the next point about the centre after c; other vN are vias at no path point)
BOOT1: C5.1 U1.41 | length 2.8
  Top Layer w0.152: U1.41 17.738,9.648 18.085,9.995 18.441,9.995 C5.1
BOOT2: C6.1 U1.38 | length 2.6
  Top Layer w0.152: U1.38 18.585,8.148 C6.1
BOOT3: C7.1 U1.35 | length 3.5
  Top Layer w0.152: U1.35 16.911,6.648 17.209,6.35 17.209,5.588 17.462,5.334 C7.1
"CAN _P": U2.7 | length 7.6
  Top Layer w0.152: U2.7 21.951,13.942 22.769,13.942 v1(22.796,13.97)
  Sig1 w0.152: v1(22.796,13.97) 29.527,13.97
CAN_N: U2.6 | length 8
  Top Layer w0.152: U2.6 21.951,13.236 22.769,13.236 v1(22.796,13.208)
  Sig1 w0.152: v1(22.796,13.208) 23.177,13.589 29.736,13.589
CAN_RX: U1.47 U2.4 | length 2.7
  Top Layer w0.152: U1.47@16.369,12.614 U2.4
CAN_TX: U1.48 U2.1 | length 3.8
  Top Layer w0.152: U1.48 16.369,14.02 16.913,14.564 U2.1
GHS1: R2.2 U1.43 VD1.1 | length 32.7
  Top Layer w0.152: v1(7.429,31.623) R2.2 8.003,32.32 8.191,32.131 8.536,32.131 VD1.1 ; U1.43 v1(17.011,10.648)
  Sig1 w0.152: v1(9.207,10.477) 14.16,10.477 14.331,10.648 v1(17.011,10.648)
  Sig2 w0.152: v1(7.429,31.623) 7.429,27.495 9.207,25.717 v1(9.207,10.477)
GHS2: R3.2 U1.40 VD2.1 | length 26.6
  Top Layer w0.152: R3.2 16.258,32.32 16.447,32.131 16.791,32.131 VD2.1 ; U1.40 16.372,9.146 17.714,9.146 v1(17.716,9.144)
  Sig2 w0.152: v1(17.081,31.813) 17.081,30.734 17.272,30.543 17.272,28.765 18.542,27.495 18.542,10.452 17.716,9.627 v1(17.716,9.144)
GHS3: R4.2 U1.37 VD3.1 | length 36.2
  Top Layer w0.152: U1.37 v1(17.011,7.648) ; R4.2 24.513,32.32 ; 24.569,32.264 24.513,32.32 ; v1(25.336,31.813) 25.585,32.062 VD3.1@25.585,32.264 ; VD3.1 25.046,32.131 24.701,32.131 24.513,32.32
  Sig1 w0.152: v1(17.011,7.648) 23.531,7.648 23.939,7.239 v1(25.082,7.239)
  Sig2 w0.152: v1(25.082,7.239) 25.082,21.336 24.575,21.844 24.575,29.909 25.336,30.67 v1(25.336,31.813)
GLS1: R6.2 U1.29 VD5.1 | length 28.7
  Top Layer w0.152: v1(7.175,26.224) 8.481,26.224 VD5.1 ; v1(14.097,6.286) 14.111,6.273 14.111,4.917 U1.29
  Sig1 w0.152: v1(8.7,6.286) v1(14.097,6.286)
  Sig2 w0.152: v1(7.175,26.224) 8.7,24.7 v1(8.7,6.286)
GLS2: R7.2 U1.30 VD6.1 | length 23.1
  Top Layer w0.152: v1(14.605,5.842) 14.615,5.832 14.615,4.913 U1.30 ; v1(15.621,26.226) R7.2 15.623,26.226 16.928,26.226 VD6.1
  Sig1 w0.152: v1(15.621,26.226) v1@15.648,26.252
  Sig2 w0.152: v1(14.605,5.842) 14.605,22.288 15.621,23.304 v1(15.621,26.226)
GLS3: R8.2 U1.31 VD7.1 | length 35.1
  Top Layer w0.152: v1(15.113,4.127) 15.119,4.133 15.119,4.897 U1.31 ; R8.2 25.174,26.351 v1(25.192,26.333) VD7.1
  Sig1 w0.152: v1(15.113,4.127) 15.145,4.159 25.686,4.159 v1(25.717,4.191)
  Sig2 w0.152: v1(25.192,26.333) 25.192,23.513 25.717,22.987 v1(25.717,4.191)
GND: C1.1 C2.1 C3.1 C4.1 C8.1 C9.1 C10.1 C11.1 C12.1 C13.1 C14.1 C15.1 C16.2 C17.2 C18.2 C19.2 C20.1 C21.2 C22.2 C23.2 C24.2 C25.1 C26.2 C27.2 C28.2 IC1.3 pad.CNT pad.PW_GND R5.1 R9.1 R10.1 R11.1 R18.2 R19.2 R20.2 R33.2 R34.2 R35.2 R44.1 R48.2 R50.2 R51.2 TP4.1 TP5.1 TP6.1 U1.32 U1.65 U2.2 U2.8 U2.9 VD4.1 | length 3.4
  Top Layer w0.508: C19.2@25.209,21.467 IC1.3
  other v1: 10.287,7.874 11.324,7.874 12.361,7.874 13.398,7.874 10.287,8.911 11.324,8.911 12.361,8.911 13.398,8.911 10.287,9.948 11.324,9.948 12.361,9.948 13.398,9.948 10.287,10.986 11.324,10.986 12.361,10.986 13.398,10.986 20.029,12.712 21.013,12.712 20.029,13.601 21.013,13.601 20.029,14.49 21.013,14.49 6.731,16.066 7.302,16.066 6.731,16.637 7.302,16.637 6.731,17.209 7.302,17.209 20.002,17.59 20.717,17.59 21.431,17.59 22.146,17.59 22.86,17.59 23.574,17.59 24.289,17.59 6.731,17.78 7.302,17.78 12.446,18.098 13.081,18.098 13.716,18.098 20.002,18.288 20.717,18.288 21.431,18.288 22.146,18.288 22.86,18.288 23.574,18.288 24.289,18.288 6.731,18.351 7.302,18.351 6.731,18.923 7.302,18.923 20.002,18.986 20.717,18.986 21.431,18.986 22.146,18.986 22.86,18.986 23.574,18.986 24.289,18.986 0.508,19.558 1.079,19.558 5.271,19.558 5.842,19.558 6.413,19.558 6.985,19.558 7.556,19.558 8.128,19.558 11.303,19.558 11.874,19.558 12.446,19.558 13.018,19.558 13.589,19.558 14.16,19.558 17.653,19.558 20.002,19.558 20.574,19.558 21.145,19.558 21.717,19.558 22.288,19.558 22.86,19.558 23.574,19.685 24.289,19.685 15.24,19.875 15.811,19.875 16.383,19.875 0.508,20.13 1.079,20.13 5.842,20.13 6.413,20.13 6.985,20.13 7.556,20.13 8.128,20.13 11.303,20.13 11.874,20.13 12.446,20.13 13.018,20.13 13.589,20.13 14.16,20.13 17.653,20.13 20.002,20.13 20.574,20.13 21.145,20.13 21.717,20.13 22.288,20.13 22.86,20.13 23.574,20.383 15.24,20.447 15.811,20.447 16.383,20.447 2.54,20.574 0.508,20.701 1.079,20.701 6.413,20.701 6.985,20.701 7.556,20.701 8.128,20.701 11.303,20.701 11.874,20.701 12.446,20.701 13.018,20.701 13.589,20.701 14.16,20.701 17.653,20.701 20.002,20.701 20.574,20.701 21.145,20.701 21.717,20.701 22.288,20.701 22.86,20.701 25.209,22.606 17.145,35.433 17.907,35.433 18.669,35.433 25.209,35.433 25.971,35.433 26.733,35.433 8.763,35.496 9.525,35.496 10.287,35.496 16.828,36.068 17.526,36.068 18.288,36.068 19.05,36.068 24.892,36.068 25.59,36.068 26.352,36.068 27.114,36.068 8.445,36.131 9.144,36.131 9.906,36.131 10.668,36.131
HALL1: R36.1 R39.1 | length 0.6
  Top Layer w0.152: R39.1 R36.1
HALL2: R37.1 R40.1 | length 0.6
  Top Layer w0.152: R40.1 R37.1
HALL3: R38.1 R43.1 | length 0.6
  Top Layer w0.152: R43.1 R38.1
NetIC1_2: IC1.2 R52.2 | length 23
  Top Layer w0.152: R52.2 26.161,21.51 26.161,22.605 IC1.2 26.16,23.493 v1(26.162,23.495)
  Sig2 w0.152: 26.162,2.476 v1(26.162,23.495)
NetQ1_1: Q1.1 R2.1 VD1.2 | length 3.9
  Top Layer w0.152: Q1.1 R2.1 8.003,33.72 8.191,33.909 8.536,33.909 VD1.2
NetQ2_1: Q2.1 R3.1 VD2.2 | length 3.9
  Top Layer w0.152: Q2.1 R3.1 16.258,33.72 16.447,33.909 16.791,33.909 VD2.2
NetQ3_1: Q3.1 R4.1 VD3.2 | length 3.9
  Top Layer w0.152: Q3.1 R4.1 24.513,33.72 24.701,33.909 25.046,33.909 VD3.2
NetQ4_1: Q4.1 R6.1 VD5.2 | length 3.8
  Top Layer w0.152: Q4.1 6.603,27.077 7.151,27.624 R6.1 8.301,27.624 8.509,27.832 VD5.2
NetQ4_2: Q4.2 R11.2 TP3.1
NetQ5_1: Q5.1 R7.1 VD6.2 | length 3.9
  Top Layer w0.152: Q5.1 15.049,27.077 15.596,27.624 R7.1 16.746,27.624 16.954,27.832 VD6.2
NetQ5_2: Q5.2 R9.2 TP1.1
NetQ6_1: Q6.1 R8.1 VD7.2 | length 3.9
  Top Layer w0.152: Q6.1 23.177,27.077 23.851,27.751 R8.1 25.065,27.751 25.209,27.896 VD7.2
NetQ6_2: Q6.2 R10.2 TP2.1
OSC_IN: U1.6
OSC_OUT: U1.7
OUT1: C5.2 pad.U Q1.2 Q4.3 R27.2 U1.42 | length 38.1
  Top Layer w0.152: U1.42 16.375,10.154 17.457,10.154 v1(17.462,10.16) ; v2(20.892,10.16) 21.138,9.914 R27.2
  Sig1 w0.152: v1(5.842,29.172) 8.61,29.172 9.144,28.639 14.605,28.639 15.811,29.845 v1(16.764,29.845) ; v1(17.462,10.16) 20.88,10.16 v2@20.892,10.148
  Sig2 w0.152: v1(16.764,29.845) 16.764,28.639 18.063,27.339 18.063,10.761 v1(17.462,10.16)
  other v1: 1.905,29.172 2.889,29.172 3.873,29.172 4.858,29.172 1.905,30.061 2.889,30.061 3.873,30.061 4.858,30.061 5.842,30.061 1.905,30.95 2.889,30.95 3.873,30.95 4.858,30.95 5.842,30.95 1.905,31.839 2.889,31.839 3.873,31.839 4.858,31.839 5.842,31.839 1.905,32.728 2.889,32.728 3.873,32.728 4.858,32.728 5.842,32.728 1.905,33.617 2.889,33.617 3.873,33.617 4.858,33.617 5.842,33.617
OUT2: C6.2 pad.V Q2.2 Q5.3 R29.2 U1.39 | length 31.5
  Top Layer w0.152: v1(15.24,8.636) 15.246,8.642 16.364,8.642 U1.39 ; C6.2 21.392,7.374 R29.2
  Sig1 w0.152: v1(15.24,8.636) v1(20.892,8.636)
  Sig2 w0.152: v1(14.224,29.172) 14.631,28.765 16.021,28.765 16.941,27.845 16.941,14.592 15.836,13.487 15.836,11.455 15.24,10.858 v1(15.24,8.636)
  other v1: 10.287,29.172 11.271,29.172 12.255,29.172 13.24,29.172 10.287,30.061 11.271,30.061 12.255,30.061 13.24,30.061 14.224,30.061 10.287,30.95 11.271,30.95 12.255,30.95 13.24,30.95 14.224,30.95 10.287,31.839 11.271,31.839 12.255,31.839 13.24,31.839 14.224,31.839 10.287,32.728 11.271,32.728 12.255,32.728 13.24,32.728 14.224,32.728 10.287,33.617 11.271,33.617 12.255,33.617 13.24,33.617 14.224,33.617
OUT3: C7.2 pad.W Q3.2 Q6.3 R31.2 U1.36 | length 31.4
  Top Layer w0.152: U1.36 16.388,7.13 17.508,7.13 v1(17.526,7.112) ; C7.2 21.392,4.834 R31.2
  Sig1 w0.152: v1(17.526,4.635) v1(20.892,4.635)
  Sig2 w0.152: v1(17.526,4.635) v1(17.526,7.112) 19.177,8.763 19.177,28.807 19.526,29.157 v1(19.526,29.172)
  other v1: 18.542,29.172 20.51,29.172 21.495,29.172 22.479,29.172 18.542,30.061 19.526,30.061 20.51,30.061 21.495,30.061 22.479,30.061 18.542,30.95 19.526,30.95 20.51,30.95 21.495,30.95 22.479,30.95 18.542,31.839 19.526,31.839 20.51,31.839 21.495,31.839 22.479,31.839 18.542,32.728 19.526,32.728 20.51,32.728 21.495,32.728 22.479,32.728 18.542,33.617 19.526,33.617 20.51,33.617 21.495,33.617 22.479,33.617
PA0: R41.1 R44.2 U1.13 VD11.1 | length 19.4
  Top Layer w0.152: U1.13 8.981,7.148 v1(9.271,6.858) ; R41.1 R44.2 12.89,17.264 v1(12.89,16.447) VD11.1
  Sig1 w0.152: v1(9.271,6.858) v1(13.589,6.858)
  Sig2 w0.152: v1(12.89,16.447) 12.89,15.811 13.97,14.732 13.97,7.239 v1@13.606,6.875
PA1: R12.2 R15.1 R18.1 U1.14 | length 4.5
  Top Layer w0.152: R12.2 R18.1 R15.1 4.699,5.905 4.953,6.159 6.032,6.159 6.521,6.648 U1.14
PA2: R24.2 U1.15 | length 1.6
  Top Layer w0.152: R24.2 6.302,5.634 6.815,6.147 U1.15 U1.15
PA3: R21.1 R24.1 U1.16 | length 3.1
  Top Layer w0.102: R21.1 5.352,5.651 5.524,5.651 5.651,5.524 5.651,5.094 5.711,5.034 R24.1
  Top Layer w0.152: R24.1 7.244,5.034 7.38,5.17 U1.16
PA6: R25.2 U1.19 | length 9.2
  Top Layer w0.152: v1(5.969,3.81) 8.826,3.81 9.124,4.108 U1.19 ; v1(5.969,8.509) R25.2
  Sig2 w0.152: v1(5.969,3.81) v1(5.969,8.509)
PA7: R13.2 R16.1 R19.1 U1.20 | length 15.6
  Top Layer w0.152: R13.2 R19.1 ; v1(3.746,3.365) 8.954,3.365 9.625,4.037 U1.20 ; v1(4.064,10.033) R19.1 ; R16.1 R19.1
  Bottom Layer w0.152: v1(3.746,3.365) 3.746,9.017 4.255,9.525 v1@4.255,10.033
PB0: R14.2 R17.1 R20.1 U1.23 | length 16.6
  Top Layer w0.152: v1(3.026,8.467) 3.083,8.41 3.19,8.41 3.429,8.172 R14.2 R20.1 R17.1 ; v1(11.112,3.365) 11.118,3.371 11.118,4.897 U1.23
  Sig1 w0.152: v1(2.984,3.873) 4.635,3.873 5.143,3.365 v1@11.106,3.365
  Bottom Layer w0.152: v1(2.984,3.873) v1@2.984,8.382
PB1: R26.2 U1.24 | length 12.7
  Top Layer w0.152: R26.2@5.969,7.184 R26.2@5.978,7.184 ; R26.2 R26.2@5.978,7.184 ; v1(6.54,2.286) 10.795,2.286 11.625,3.116 U1.24 ; v1(6.54,7.175) 6.532,7.184 R26.2@5.978,7.184
  Sig2 w0.152: v1(6.54,2.286) v1(6.54,7.175)
PB2: R23.1 R26.1 U1.25 | length 15.9
  Top Layer w0.152: R23.1 R26.1 R26.1@6.01,7.833 ; 5.565,7.833 6.5,7.833 v1(6.54,7.874) ; v1(7.048,1.651) 11.239,1.651 12.124,2.536 U1.25
  Sig2 w0.152: v1(6.54,7.874) 7.048,7.366 v1(7.048,1.651)
PB6: C21.1 R39.2 U1.57 | length 7.6
  Top Layer w0.152: U1.57 v1(11.625,14.534) ; v1(15.557,16.383) 15.549,16.374 15.549,15.757 C21.1 R39.2
  Sig1 w0.152: v1(11.625,14.534) 11.62,14.538 11.62,15.557 12.002,15.938 13.144,15.938 13.589,16.383 v1(15.557,16.383)
PB7: C22.1 R40.2 U1.58 | length 10.2
  Top Layer w0.152: v1(11.124,13.252) U1.58 ; v1(15.54,17.417) C22.1 R40.2
  Sig1 w0.152: v1(11.124,13.252) 11.124,15.633 11.62,16.129 11.62,17.081 12.002,17.462 15.494,17.462 v1(15.54,17.417)
PB8: C23.1 R43.2 U1.59 | length 10.4
  Top Layer w0.152: U1.59 v1(10.625,14.534) ; v1(15.54,18.687) C23.1 R43.2
  Sig1 w0.152: v1(10.625,14.534) 10.625,15.705 11.239,16.319 11.239,18.161 11.765,18.687 v1(15.54,18.687)
PB10: R47.2 U1.28 | length 16.4
  Top Layer w0.152: U1.28 13.625,4.236 13.843,4.018 v1(13.843,3.937) ; v1(17.653,17.018) R47.2
  Sig2 w0.152: v1(13.843,3.937) 16.066,6.159 16.066,10.731 16.447,11.112 16.447,13.335 17.653,14.541 v1(17.653,17.018)
PC0: C16.1 R27.1 R33.1 U1.9 VD8.1 | length 22.8
  Top Layer w0.152: U1.9 9.267,9.148 v1(9.271,9.144) ; R33.1@22.306,11.62 22.306,10.932 R27.1 C16.1 23.241,10.914 23.249,10.922 VD8.1 v1(24.066,11.938)
  Sig1 w0.152: v1(9.271,9.144) 9.328,9.201 9.709,9.201 9.906,9.398 16.51,9.398 16.764,9.652 19.685,9.652 20.002,9.335 23.431,9.335 24.066,9.97 v1(24.066,11.938)
PC1: C17.1 R29.1 R34.1 U1.10 VD9.1 | length 20.7
  Top Layer w0.152: U1.10 8.243,8.648 v1(8.255,8.636) ; R34.1 22.243,8.392 R29.1 C17.1 23.186,8.382 VD9.1 v1(24.638,8.382)
  Sig1 w0.152: v1(8.255,8.636) 9.716,8.636 9.906,8.445 14.224,8.445 14.541,8.128 24.378,8.128 24.632,8.382 v1(24.638,8.382)
PC2: C18.1 R31.1 R35.1 U1.11 VD10.1 | length 21.4
  Top Layer w0.152: U1.11 9.251,8.148 v1(9.271,8.128) ; R35.1@22.243,6.54 22.243,5.852 R31.1 C18.1 23.193,5.849 VD10.1 24.075,5.842 24.078,5.846 24.634,5.846 v1(24.638,5.842)
  Sig1 w0.152: v1(9.271,8.128) 10.033,7.366 15.811,7.366 16.573,6.604 23.876,6.604 v1(24.638,5.842)
PC3: C24.1 R48.1 U1.12 | length 10.3
  Top Layer w0.152: 5.207,0.254 v1(5.207,2.54) ; U1.12 8.227,7.648 v1(8.255,7.62)
  Bottom Layer w0.152: v1(5.207,2.54) 5.588,2.921 6.286,2.921 7.302,3.937 7.302,7.239 7.683,7.62 v1(8.255,7.62)
PC4: U1.21
PC5: R22.1 R25.1 U1.22 | length 13
  Top Layer w0.152: R22.1 6.423,9.571 6.54,9.453 v1(6.54,8.954) ; v1(7.62,2.857) 10.096,2.857 10.625,3.386 U1.22
  Sig2 w0.152: v1(6.54,8.954) 7.62,7.874 v1(7.62,2.857)
PC13: R46.2 U1.3 | length 17.9
  Top Layer w0.152: U1.3 v1(8.021,12.148) ; v1(17.653,18.923) R46.2
  Sig1 w0.152: v1(8.021,12.148) 8.021,18.479 8.592,19.05 14.986,19.05 15.367,19.431 17.145,19.431 v1(17.653,18.923)
PG10: C28.1 R49.2 U1.8 | length 4.9
  Top Layer w0.152: C28.1@3.294,10.922 R49.2 4.643,10.47 4.763,10.351 6.159,10.351 6.845,9.665 7.363,9.665 U1.8
SCREF: R1.1 R5.2 U1.52 | length 1.9
  Top Layer w0.152: U1.52 14.134,13.902 14.134,15.104 R5.2 R1.1
SHUNTN1: R21.2 TP6.2 | length 23.3
  Top Layer w0.152: v1(5.334,4.509) R21.2
  Sig1 w0.152: v1(4.572,22.771) 2.896,22.771 1.968,21.844 1.968,7.144 2.984,6.128 4.858,6.128 5.334,5.652 v1(5.334,4.509)
SHUNTN2: R22.2 TP4.2 | length 21.5
  Top Layer w0.152: v1(5.334,8.509) R22.2
  Sig1 w0.152: v1(5.334,8.509) 5.334,10.351 3.873,11.811 3.873,19.113 7.531,22.771 v1(12.192,22.771)
SHUNTN3: R23.2 TP5.2 | length 34.1
  Top Layer w0.152: v1(5.334,6.667) R23.2
  Sig1 w0.152: v1@5.334,6.546 5.334,7.493 4.953,7.874 4.508,7.874 4.103,8.28 4.103,9.169 3.048,10.223 3.048,19.621 7.493,24.066 13.271,24.066 14.567,22.771 v1(19.939,22.771)
SHUNTP1: R15.2 TP3.2 | length 24.1
  Top Layer w0.152: v1(4.699,4.509) R15.2
  Sig1 w0.152: v1(4.572,23.47) 2.705,23.47 1.587,22.352 1.587,6.731 2.603,5.715 4.318,5.715 4.699,5.334 v1(4.699,4.509)
SHUNTP2: R16.2 TP1.2 | length 22.3
  Top Layer w0.152: v1(4.699,8.509) R16.2
  Sig1 w0.152: v1@4.699,8.382 4.699,10.351 3.492,11.557 3.492,19.367 7.595,23.47 v1(12.192,23.47)
SHUNTP3: R17.2 TP2.2 | length 34.3
  Top Layer w0.152: v1(4.699,6.667) R17.2
  Sig1 w0.152: v1@4.699,6.611 v1(4.699,6.667) 4.699,7.175 3.785,8.089 3.785,8.915 2.667,10.033 2.667,19.875 7.302,24.511 13.525,24.511 14.567,23.47 v1(19.939,23.47)
SPI1_MISO: U1.55 | length 0.6
  Top Layer w0.152: U1.55 v1(12.625,14.534)
SPI1_MOSI: U1.56 | length 0.6
  Top Layer w0.152: v1(12.124,13.252) U1.56
SPI1_NSS: U1.17 | length 8.3
  Top Layer w0.152: v1(8.124,4.262) U1.17
  Sig1 w0.152: v1(8.124,4.262) 8.124,6.29 7.62,6.794 7.62,10.414 8.509,11.303
SPI1_SCK: U1.54 | length 0.6
  Top Layer w0.152: v1(13.124,13.252) U1.54
SW: L1.1 U1.62 VD4.2
SWCLK: U1.50 | length 18
  Top Layer w0.152: v1(15.124,13.252) U1.50
  Sig1 w0.152: v1(15.124,13.252) 15.647,13.252 19.159,16.764 31.057,16.764
SWDIO: U1.49 | length 17.1
  Top Layer w0.152: U1.49 v1(15.625,14.534)
  Sig1 w0.152: v1(15.625,14.534) 16.439,14.534 18.986,17.081 31.057,17.081
UART_RX: U1.46 | length 16.1
  Top Layer w0.152: v1(15.303,12.128) 15.313,12.138 16.36,12.138 U1.46
  Sig1 w0.152: v1(15.303,12.128) 22.924,12.128 23.812,13.018 29.999,13.018
UART_TX: U1.45 | length 13.5
  Top Layer w0.152: U1.45 v1(17.011,11.648)
  Sig1 w0.152: v1(17.011,11.648) 22.951,11.648 23.876,12.573 29.527,12.573
USER1: C26.1 R46.1 R50.1 | length 1.3
  Top Layer w0.152: R50.1 C26.1 R46.1
USER2: C27.1 R47.1 R51.1 | length 1.3
  Top Layer w0.152: C27.1 R51.1 R47.1
VCC_BUCK: C4.2 L1.2 U1.63 U1.64
VDD_3V3: C8.2 C9.2 C10.2 C11.2 C12.2 C13.2 C14.2 C19.1 C20.2 C25.2 IC1.1 R1.2 R12.1 R13.1 R14.1 R36.2 R37.2 R38.2 R49.1 R52.1 U1.1 U1.2 U1.26 U1.27 U2.3 VD8.2 VD9.2 VD10.2 VD11.2 | length 20.3
  Top Layer w0.152: R12.1 2.121,5.034 2.032,5.123 2.032,6.766 2.459,7.193 ; R14.1 C9.2 2.459,7.193 ; R13.1 2.24,8.971 2.032,8.763 2.032,8.636 2.032,7.62 2.459,7.193 ; R49.1 5.644,11.532 5.779,11.667 v1(5.779,11.747) ; 6.286,12.636 6.298,12.648 U1.2 ; 6.286,13.144 6.29,13.148 U1.1 ; U1.26 12.625,4.139 12.636,4.127 ; 13.081,4.127 13.124,4.171 U1.27 ; v1(14.097,15.875) 14.104,15.882 VD11.2 ; R1.2 v1(16.129,15.113) ; v1(16.129,16.383) R36.2 ; v1(16.129,17.653) R37.2 ; v1(16.129,18.923) R38.2 ; v1(24.257,20.892) v1@24.259,20.894 ; IC1.1 v1@24.259,20.894 ; R52.1 26.153,20.9 24.266,20.9 v1@24.259,20.894
  Top Layer w0.254: v1(17.485,13.262) 17.574,13.262 17.576,13.264 18.026,13.264 18.029,13.266 C25.2@18.098,13.266 ; C25.2@18.098,13.264 U2.3
  other v1: 15.05,2.667 15.05,3.238 2.032,5.016 5.271,11.747
VM: C1.2 C2.2 C3.2 C15.2 pad.PW_IN Q1.3 Q2.3 Q3.3 R41.2 U1.61 | length 1.6
  Top Layer w0.508: R41.2@10.384,17.268 10.384,15.713 C15.2
  other v1: 10.096,16.383 10.668,16.383 7.608,38.937 7.598,39.584
pads on no net: U1.4 U1.5 U1.18 U1.33 U1.34 U1.44 U1.51 U1.53 U1.60 U2.5

## Polygon pours and split planes (outlines as drawn)
VDD_3V3 on Top Layer "NONET_L-01_P-001" (solid, remove dead copper, pour order 9): 12.446,4.127 12.446,2.54 12.509,2.476 15.24,2.476 15.303,2.54 15.303,3.365 15.24,3.429 13.399,3.429 13.271,3.556 13.271,4.127 13.208,4.191 12.509,4.191
VM on Top Layer "NONET_L-01_P-001" (solid, remove dead copper, pour order 12): 8.319,37.973 8.509,38.163 10.795,38.163 10.986,37.973 16.7,37.973 16.954,38.227 18.923,38.227 19.177,37.973 24.828,37.973 25.082,38.227 27.749,38.227 28,38.477 28,43.184 27.749,43.434 2.286,43.434 2.095,43.243 2.095,38.163 2.286,37.973
SW on Top Layer "NONET_L-01_P-001" (solid, remove dead copper, pour order 11): 7.81,18.161 7.81,18.732 7.938,18.86 10.986,18.86 11.049,18.796 11.049,18.034 10.986,17.97 9.779,17.97 9.525,17.716 9.525,17.526
VDD_3V3 on Top Layer "NONET_L-01_P-001" (solid, remove dead copper, pour order 10): 6.667,13.97 6.731,13.906 6.731,11.557 6.667,11.493 4.191,11.493 4.127,11.557 4.127,13.906 4.191,13.97
OUT1 on Top Layer "NONET_L-01_P-001" (solid, remove dead copper, pour order 8): 3.238,36.957 3.238,35.179 2.857,34.798 1.714,34.798 1.46,34.544 1.46,28.956 1.714,28.702 6.413,28.702 6.667,28.956 6.667,36.957
OUT2 on Top Layer "NONET_L-01_P-001" (solid, remove dead copper, pour order 7): 11.493,36.957 11.493,35.179 11.112,34.798 9.97,34.798 9.716,34.544 9.716,28.956 9.97,28.702 14.668,28.702 14.922,28.956 14.922,36.957
OUT3 on Top Layer "NONET_L-01_P-001" (solid, remove dead copper, pour order 6): 19.748,36.957 19.748,35.179 19.367,34.798 18.224,34.798 17.97,34.544 17.97,28.956 18.224,28.702 22.924,28.702 23.177,28.956 23.177,36.957
NetQ4_2 on Top Layer "NONET_L-01_P-001" (solid, remove dead copper, pour order 5): 4.889,28.194 5.016,28.067 5.016,24.257 1.333,24.257 1.333,28.067 1.46,28.194
NetQ5_2 on Top Layer "NONET_L-01_P-001" (solid, remove dead copper, pour order 4): 13.271,28.194 13.399,28.067 13.399,24.257 9.716,24.257 9.716,28.067 9.842,28.194
NetQ6_2 on Top Layer "NONET_L-01_P-001" (solid, remove dead copper, pour order 3): 21.526,28.194 21.653,28.067 21.653,24.257 17.97,24.257 17.97,28.067 18.098,28.194
VCC_BUCK on Top Layer "NONET_L-01_P-001" (solid, remove dead copper, pour order 2): 2.349,16.002 3.873,16.002 4.381,16.51 4.381,18.161 4.508,18.288 6.159,18.288 6.286,18.161 6.286,15.748 6.667,15.367 8.319,15.367 8.826,14.859 8.826,13.462 7.938,13.462 7.938,14.478 7.81,14.605 2.349,14.605
VM on Top Layer "NONET_L-01_P-001" (solid, remove dead copper, pour order 1): 9.461,13.462 9.461,14.986 9.842,15.367 9.842,16.51 9.969,16.637 10.731,16.637 10.858,16.51 10.858,15.367 9.842,14.351 9.842,13.462
SW on Top Layer "NONET_L-01_P-001" (solid, remove dead copper, pour order 0): 8.954,13.462 9.335,13.462 9.335,15.113 9.588,15.367 9.588,18.161 7.81,18.161 7.81,15.748 8.064,15.494 8.445,15.494 8.954,14.986
OUT3 on Sig2 "OUTPUT_W" (solid, remove dead copper, pour order 19): 17.653,44.767 17.907,45.021 25.336,45.021 25.654,44.704 25.654,37.719 24.511,36.576 24.511,28.956 24.257,28.702 17.97,28.702 17.653,29.019
OUT2 on Sig2 "OUTPUT_V" (solid, remove dead copper, pour order 18): 10.668,44.64 11.049,45.021 16.954,45.021 17.272,44.704 17.272,37.846 16.383,36.957 16.383,28.892 16.002,28.511 9.97,28.511 9.461,29.019 9.461,34.29 10.668,35.496
OUT1 on Sig2 "OUTPUT_U" (solid, remove dead copper, pour order 17): 1.206,36.068 1.714,36.576 1.714,45.021 7.938,45.021 7.938,36.386 7.938,29.019 7.62,28.702 1.524,28.702 1.206,29.019
VM on Sig2 "NONET_L-01_P-001" (solid, remove dead copper, pour order 13): 9.842,16.256 10.033,16.066 10.731,16.066 10.922,16.256 10.922,27.178 9.207,28.892 9.207,33.846 7.874,35.179 7.874,39.751 7.747,39.878 7.429,39.878 7.302,39.751 7.302,34.734 8.445,33.591 8.445,28.384 9.842,26.987
OUT3 on Power "OUTPUT_W" (solid, remove dead copper, pour order 16): 17.653,44.767 17.907,45.021 25.336,45.021 25.654,44.704 25.654,37.719 24.511,36.576 24.511,28.956 24.257,28.702 17.97,28.702 17.653,29.019
OUT2 on Power "OUTPUT_V" (solid, remove dead copper, pour order 15): 10.668,44.64 11.049,45.021 16.954,45.021 17.272,44.704 17.272,37.846 16.383,36.957 16.383,28.892 16.002,28.511 9.97,28.511 9.461,29.019 9.461,34.29 10.668,35.496
OUT1 on Power "OUTPUT_U" (solid, remove dead copper, pour order 14): 1.206,36.068 2.095,36.957 2.095,45.021 9.652,45.021 10.033,44.64 10.033,37.02 9.652,36.639 8.191,36.639 7.938,36.386 7.938,29.019 7.62,28.702 1.524,28.702 1.206,29.019
OUT3 on Sig1 "OUTPUT_W" (solid, remove dead copper, pour order 22): 17.653,44.767 17.907,45.021 25.336,45.021 25.654,44.704 25.654,37.719 24.511,36.576 24.511,28.956 24.257,28.702 17.97,28.702 17.653,29.019
OUT2 on Sig1 "OUTPUT_V" (solid, remove dead copper, pour order 21): 10.668,44.64 11.049,45.021 16.954,45.021 17.272,44.704 17.272,37.846 16.383,36.957 16.383,28.892 16.002,28.511 9.97,28.511 9.461,29.019 9.461,34.29 10.668,35.496
OUT1 on Sig1 "OUTPUT_U" (solid, remove dead copper, pour order 20): 1.206,36.068 2.095,36.957 2.095,45.021 9.652,45.021 10.033,44.64 10.033,37.02 9.652,36.639 8.191,36.639 7.938,36.386 7.938,29.019 7.62,28.702 1.524,28.702 1.206,29.019

## Other copper
Bottom Layer:
  pour cut-out: 1.46,28.702 1.46,34.036 6.286,34.036 6.286,28.702
  pour cut-out: 9.842,28.702 9.842,34.036 14.668,34.036 14.668,28.702
  pour cut-out: 18.098,28.702 18.098,34.036 22.924,34.036 22.924,28.702

## Silkscreen, mask and mechanical layers (free items; w line width, h text height)
Top Overlay:
  lines w0.254: 0,0 28,0 28,45 0,45 0,0
  lines w1.2: 14,45 14,48.738
Top Paste:
  rectangle: 0.826,19.748 2.032,20.511
  rectangle: 2.54,19.748 3.746,20.511
  rectangle: 4.255,19.748 5.461,20.511
  rectangle: 5.969,19.748 7.175,20.511
  rectangle: 7.683,19.748 8.89,20.511
  rectangle: 9.398,19.748 10.604,20.511
  rectangle: 11.112,19.748 12.319,20.511
  rectangle: 12.827,19.748 14.034,20.511
  rectangle: 14.541,19.748 15.748,20.511
  rectangle: 16.256,19.748 17.462,20.511
  rectangle: 19.685,19.748 20.892,20.511
  rectangle: 17.97,19.748 19.177,20.511
  rectangle: 21.399,19.748 22.606,20.511
Top Solder:
  lines w1.2: 1.968,20.13 22.479,20.13
Mechanical 1:
  the board outline again, w0.254